# Altium PCB PCB_MB.PcbDoc
Units mm, origin at the board's own origin, x right, y up, seen from the top; angles counter-clockwise.
Board outline 168.5 x 167.5 mm, 4 copper layers (Top Layer, GROUND, Digital, Bottom Layer), stack 0.778 mm thick; 72 components, 91 nets, 516 pads, 10 vias.
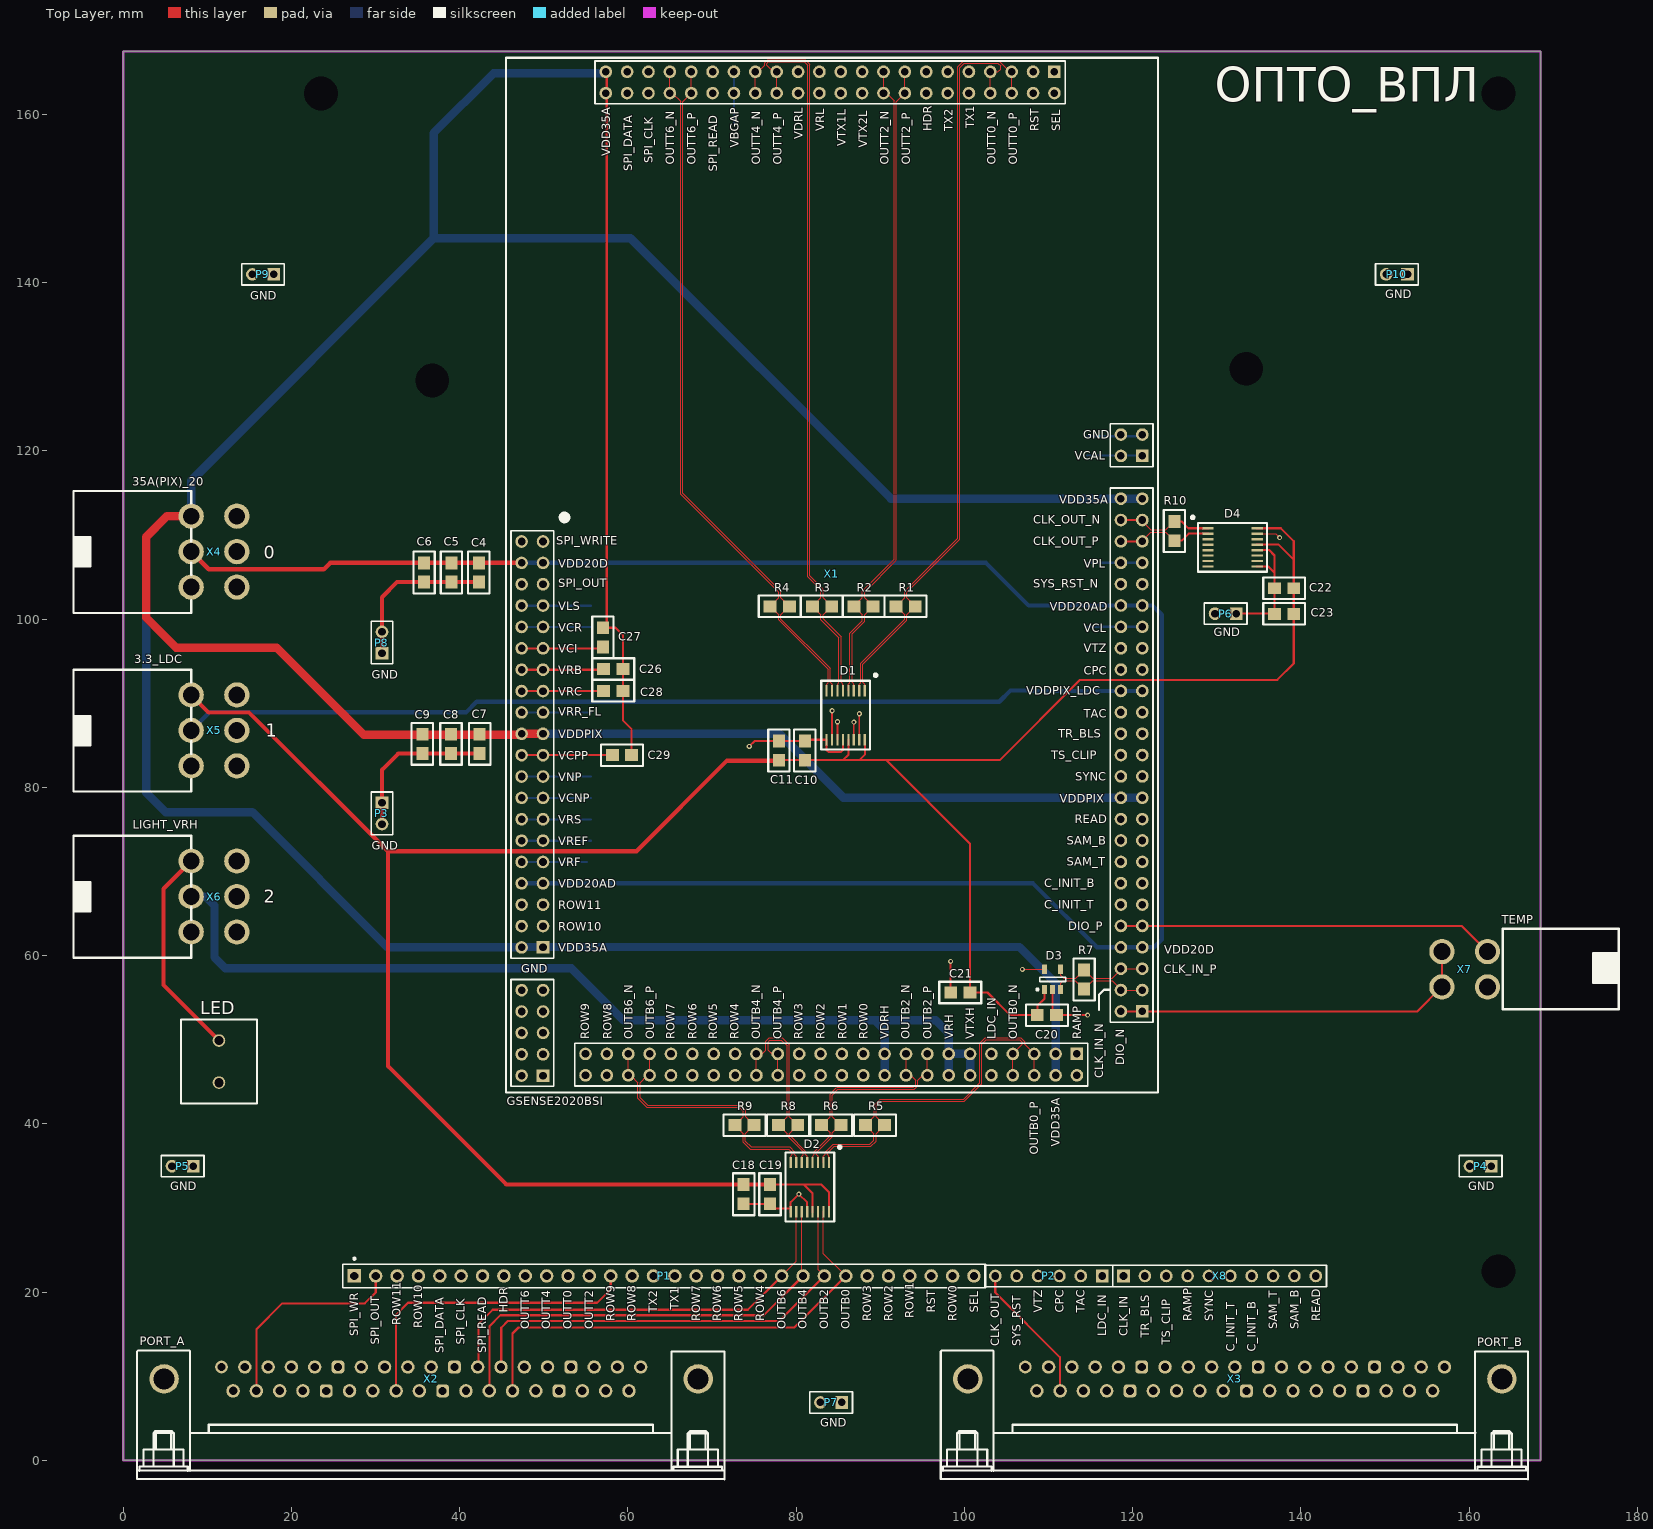
[diagram p0: Top Layer view]
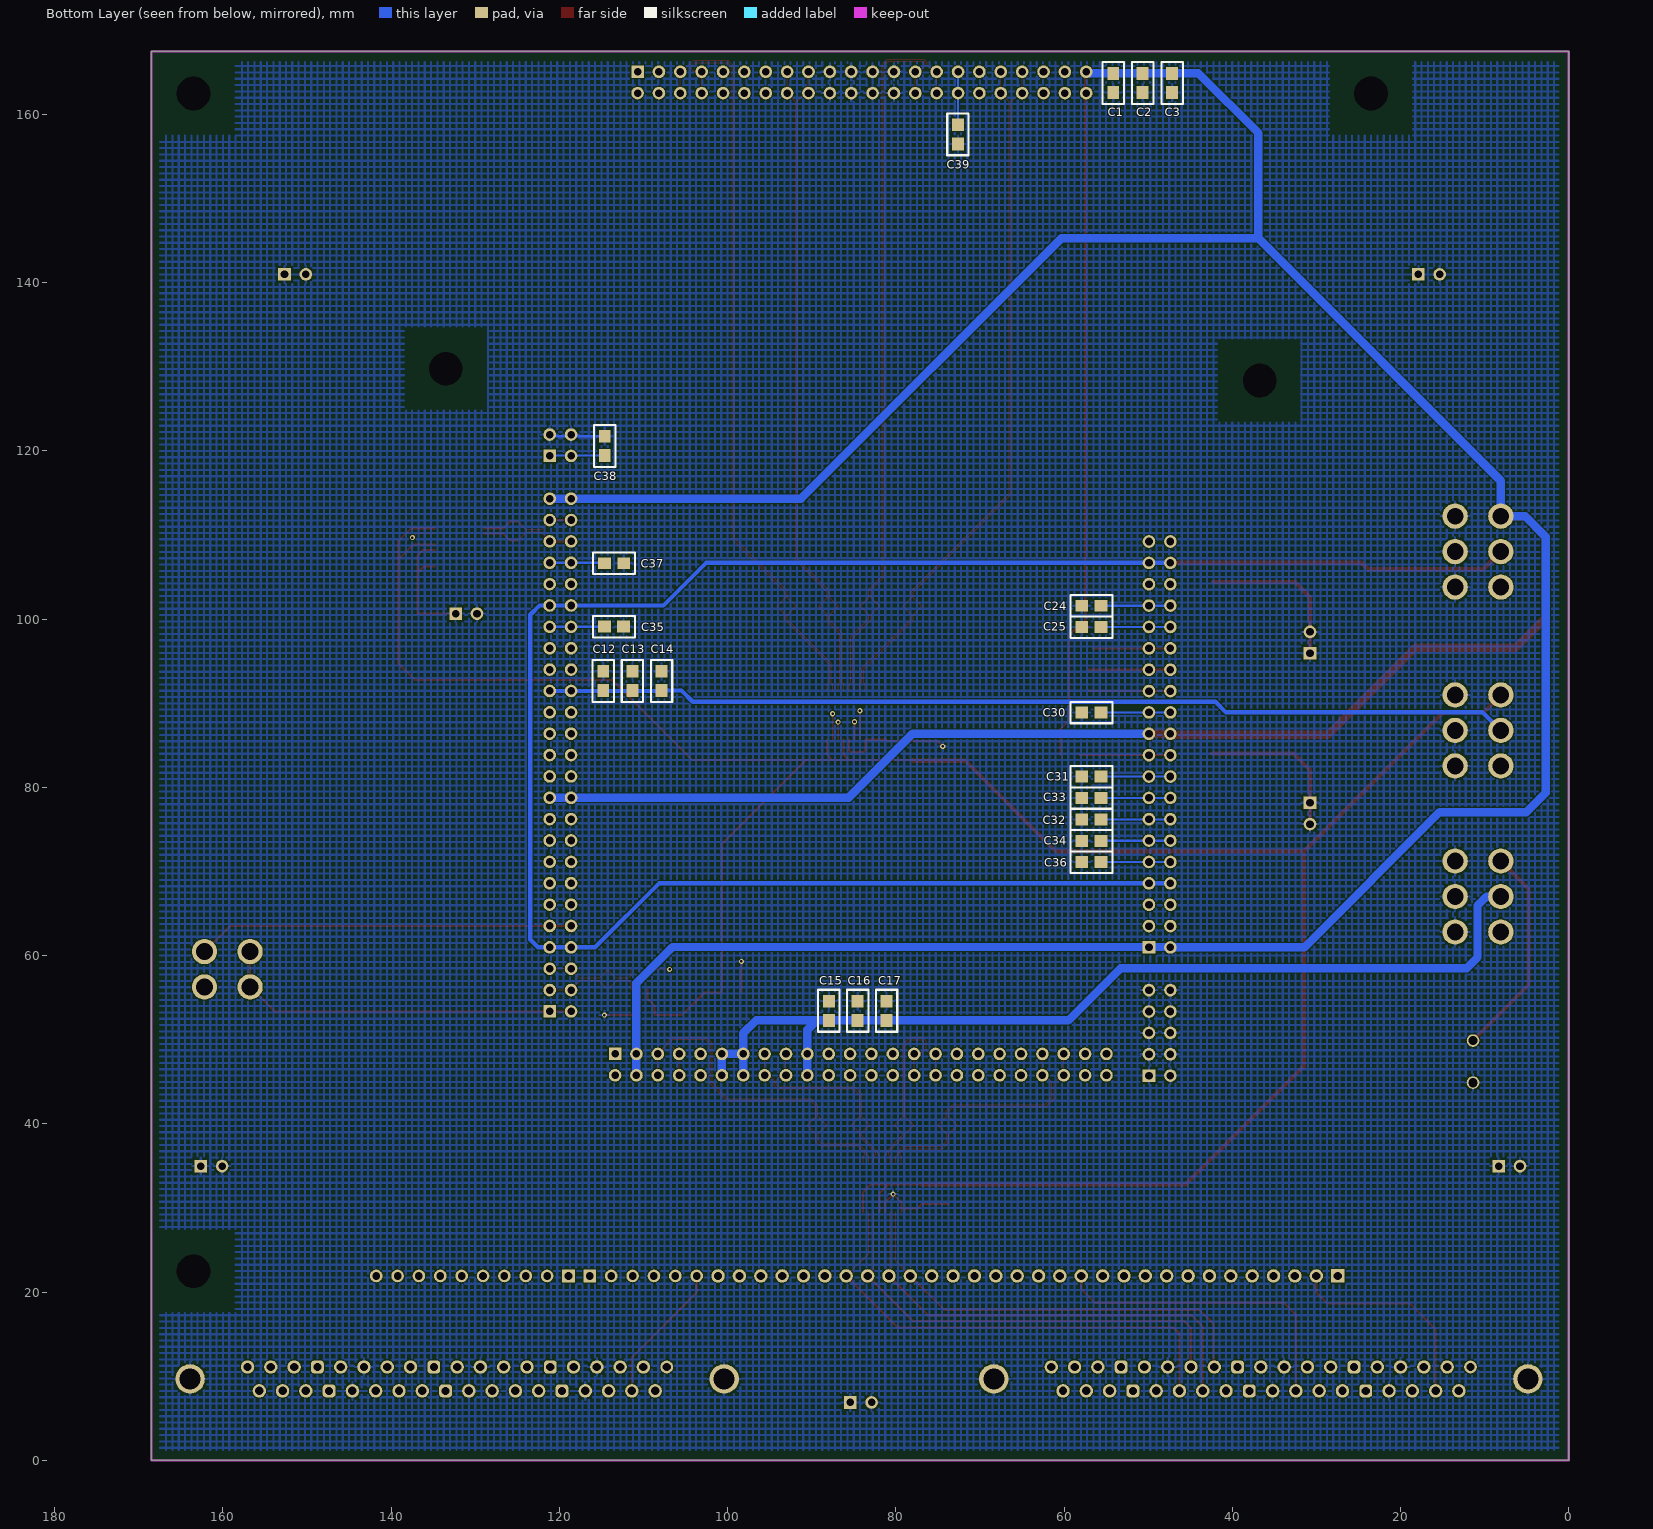
[diagram p1: Bottom Layer view, seen from below]
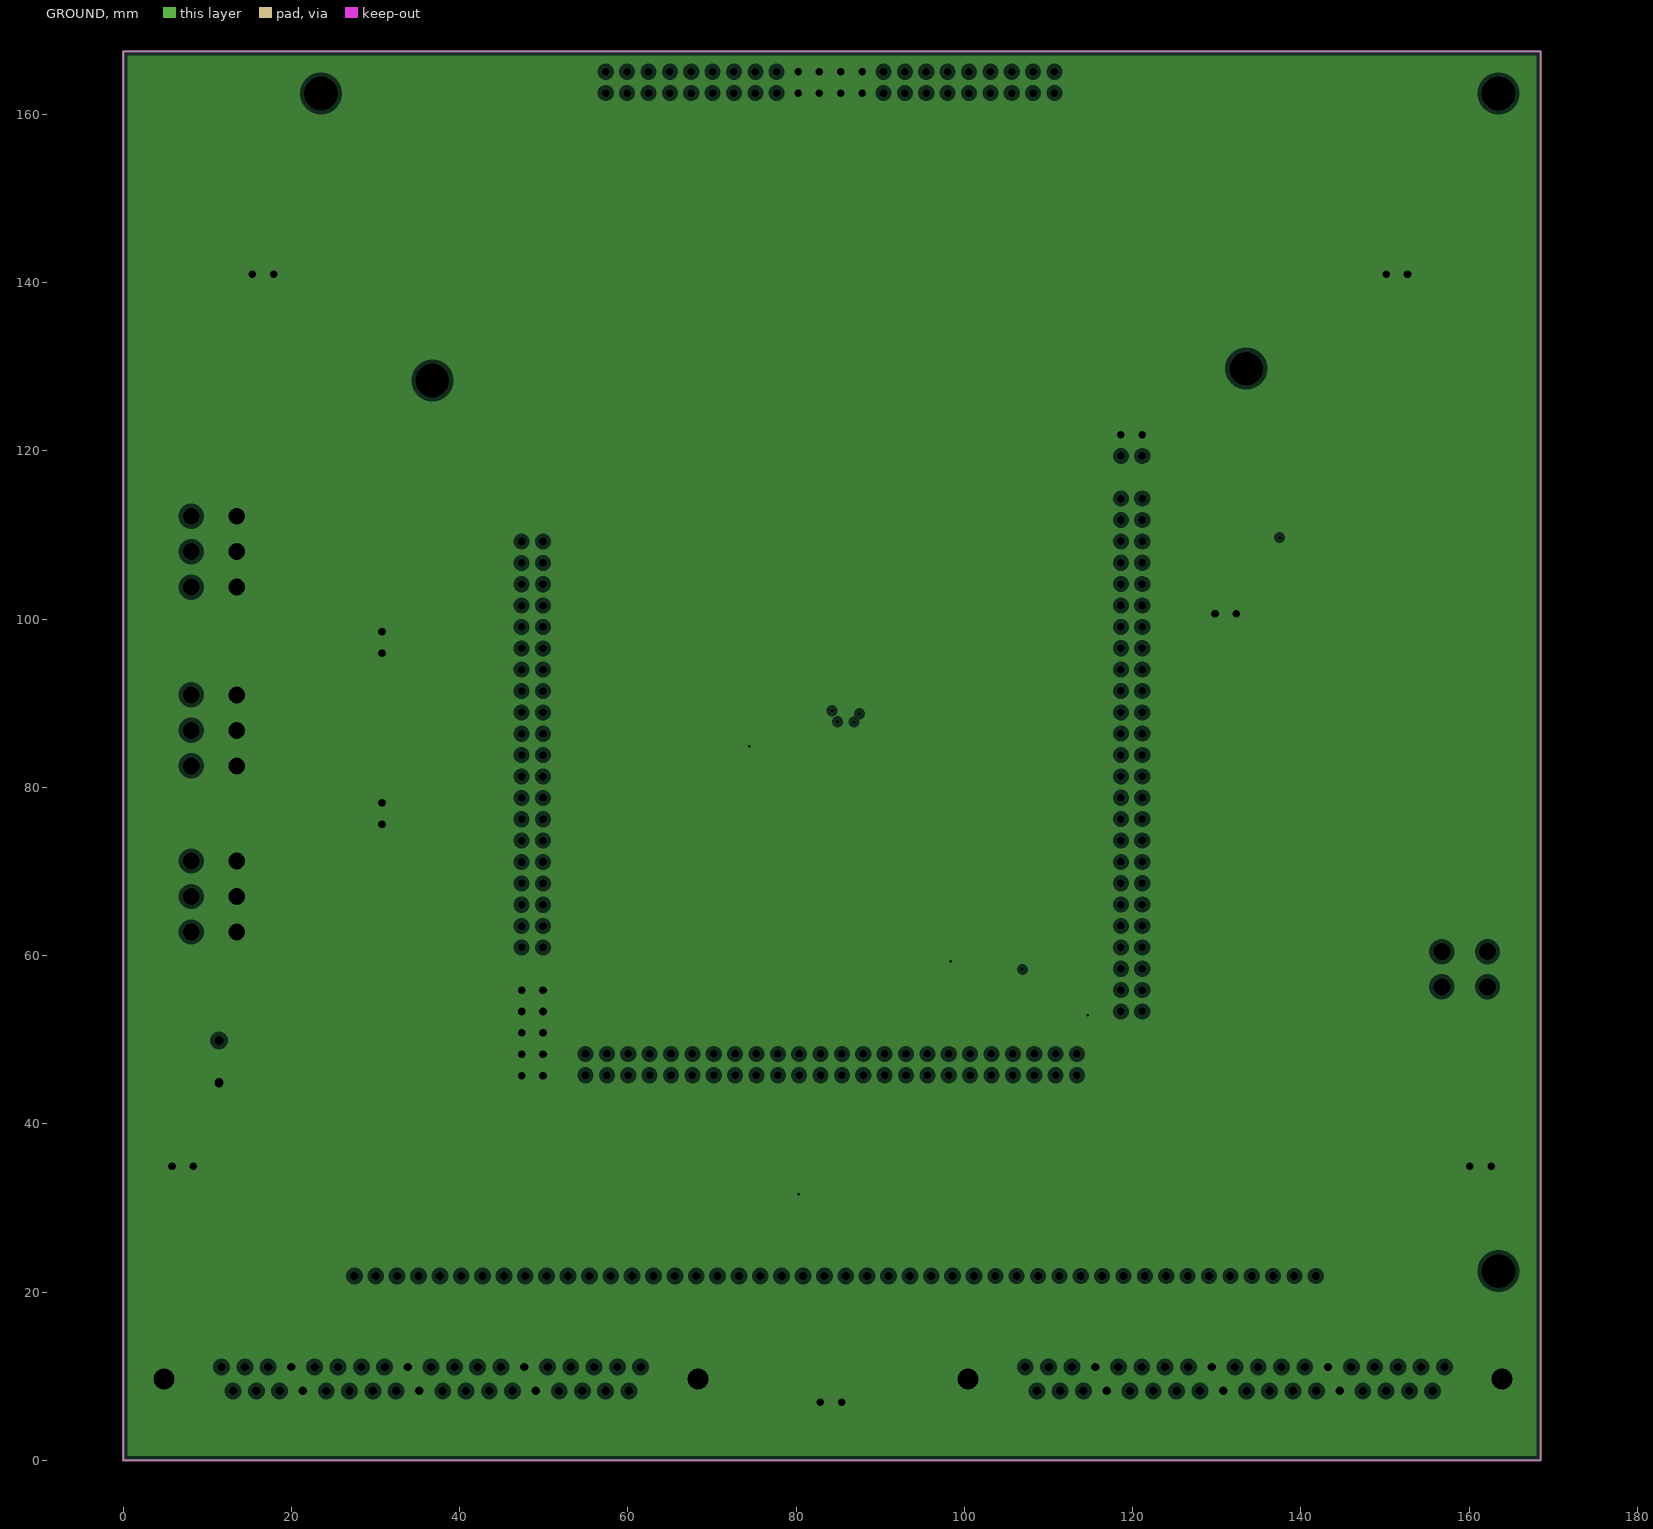
[diagram p2: GROUND, clearances drawn from the general rule]
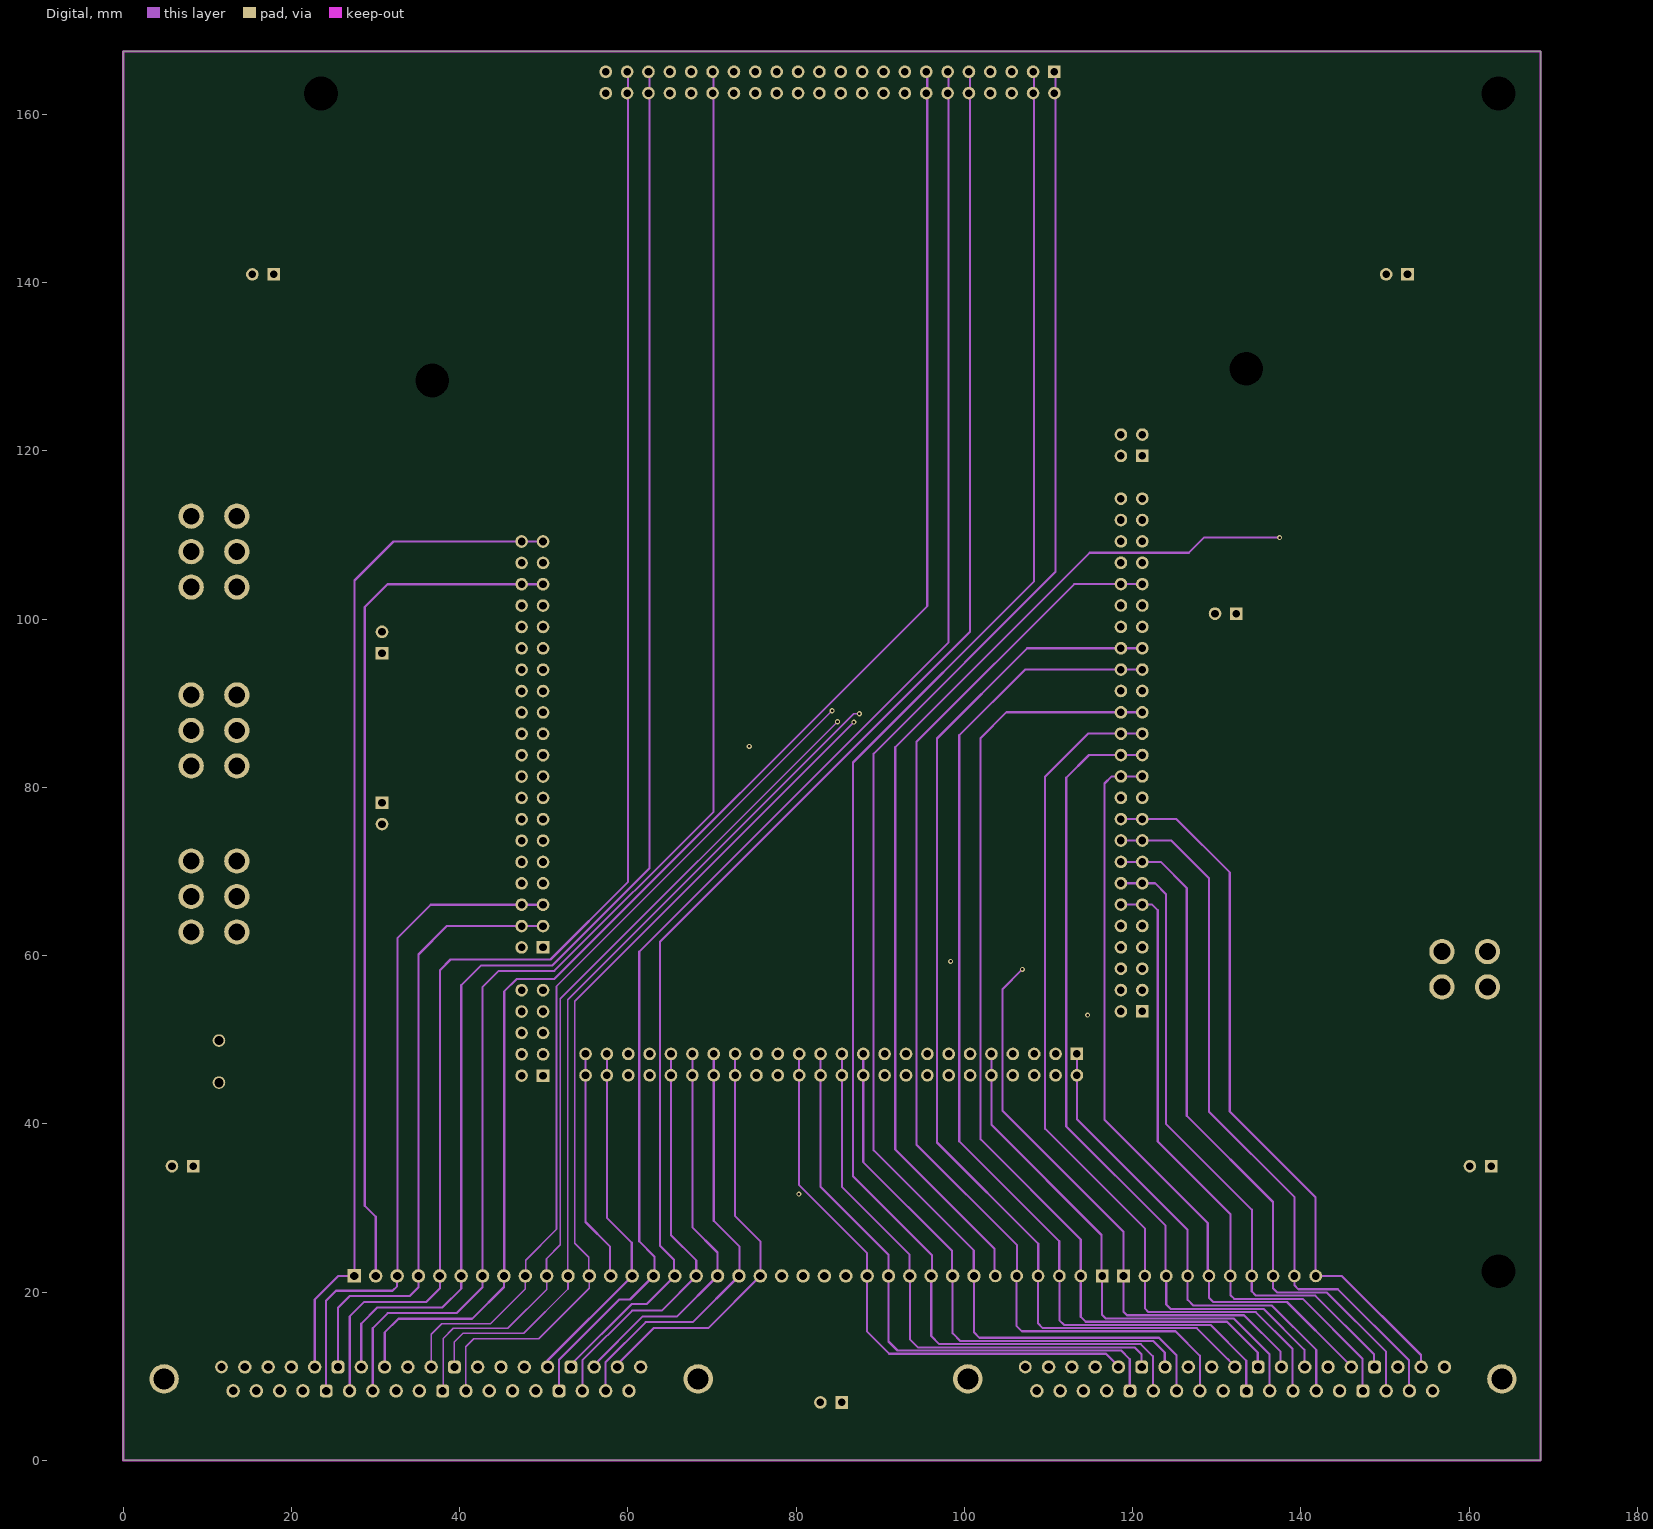
[diagram p3: Digital]

## Layer stack, top to bottom
Top Solder: solder mask 0.0102, Solder Resist, Dk 3.5
Top Layer: signal copper 0.0356
Dielectric 1: core 0.254, FR-4, Dk 4.2
GROUND: plane copper 0.036, net GND
Dielectric 2: core 0.254, Dk 4.2
Digital: signal copper 0.036
Dielectric 3: prepreg 0.127, Dk 4.2
Bottom Layer: signal copper 0.0356
Bottom Solder: solder mask 0.0102, Solder Resist, Dk 3.5

## Board outline
0,0 0,167.5 168.5,167.5 168.5,0

## Design rules (kind name [scope] priority, off if disabled: settings)
Clearance [All] p1: gap=0.127
DiffPairsRouting [All] p1: maxlimit=0.5 minlimit=0.127 mostfreqgap=0.254 toplayer_prefgap=0.127 toplayer_minwidth=0.127 toplayer_maxwidth=0.381 toplayer_prefwidth=0.127 midlayer1_mingap=0.254 midlayer1_maxgap=0.254 midlayer1_minwidth=0.127 midlayer1_maxwidth=0.381 midlayer1_prefwidth=0.381 bottomlayer_prefgap=0.127 bottomlayer_minwidth=0.127 bottomlayer_maxwidth=0.381 bottomlayer_prefwidth=0.127 maxuncoupledlength=12.7
PlaneClearance [All] p1: clearance=0.508
PlaneConnect [All] p1: planeconnectstyle=Relief reliefexpansion=0.508 reliefentries=4 reliefconductorwidth=0.254 reliefairgap=0.254
PolygonConnect [All] p1: connectstyle=Relief reliefconductorwidth=0.254 reliefentries=4 polygonreliefangle="90 Angle" airgapwidth=0.254
RoutingVias [All] p1: holewidth=0.711 width=1.27 viastyle="Through Hole" minholewidth=0.711 minwidth=1.27 maxholewidth=0.711 maxwidth=1.27
SolderMaskExpansion [All] p1: expansion=0.102
Width [All] p1: maxlimit=1 minlimit=0.125 preferedwidth=0.254
26 further rules are at their usual default settings.

## Classes and differential pairs
differential pair OUTT6: +OUTT6_P -OUTT6_N
differential pair OUTT4: +OUTT4_P -OUTT4_N
differential pair OUTT2: +OUTT2_P -OUTT2_N
differential pair OUTT0: +OUTT0_P -OUTT0_N
differential pair OUTB6: +OUTB6_P -OUTB6_N
differential pair OUTB4: +OUTB4_P -OUTB4_N
differential pair OUTB2: +OUTB2_P -OUTB2_N
differential pair OUTB0: +OUTB0_P -OUTB0_N
differential pair CLK_OUT: +CLK_OUT_P -CLK_OUT_N
differential pair CLK_IN: +CLK_IN_P -CLK_IN_N

## Components (designator, comment, footprint, x,y, rotation, side; value= is the part's Value field where it differs from the comment)
C1 "0,1 мк" CAP_SMALL 52.883,161.239 r90 bottom
C2 "0,1 мк" CAP_SMALL 49.378,161.239 r90 bottom
C3 "1 мк" CAP_SMALL 45.872,161.239 r90 bottom
C4 "0,1 мк" CAP_SMALL 43.536,103.048 r90 top
C5 "0,1 мк" CAP_SMALL 40.284,103.048 r90 top
C6 "1 мк" CAP_SMALL 37.033,103.048 r90 top
C7 "0,1 мк" CAP_SMALL 43.637,82.677 r90 top
C8 "0,1 мк" CAP_SMALL 40.234,82.677 r90 top
C9 "1 мк" CAP_SMALL 36.83,82.677 r90 top
C10 "0,1 мк" CAP_SMALL 76.683,86.893 r270 top
C11 "1 мк" CAP_SMALL 79.756,86.893 r270 top
C12 "0,1 мк" CAP_SMALL 116.053,95.174 r270 bottom
C13 "0,1 мк" CAP_SMALL 112.585,95.174 r270 bottom
C14 "1 мк" CAP_SMALL 109.118,95.174 r270 bottom
C15 "0,1 мк" CAP_SMALL 89.23,55.956 r270 bottom
C16 "0,1 мк" CAP_SMALL 85.801,55.956 r270 bottom
C17 "1 мк" CAP_SMALL 82.372,55.956 r270 bottom
C18 "0,1 мк" CAP_SMALL 75.032,29.134 r90 top
C19 "1 мк" CAP_SMALL 78.156,29.134 r90 top
C20 "0,1 мк" CAP_SMALL 112.319,54.204 r180 top
C21 "1 мк" CAP_SMALL 97.003,54.356 r0 top
C22 "0,1 мк" CAP_SMALL 135.509,102.413 r0 top
C23 "1 мк" CAP_SMALL 135.509,99.365 r0 top
C24 "0,1 мк" CAP_SMALL 59.258,100.33 r180 bottom
C25 "0,1 мк" CAP_SMALL 59.258,97.79 r180 bottom
C26 "1 мк" CAP_SMALL 60.757,95.352 r180 top
C27 "0,1 мк" CAP_SMALL 55.753,100.355 r270 top
C28 "1 мк" CAP_SMALL 60.757,92.761 r180 top
C29 "0,1 мк" CAP_SMALL 61.798,85.115 r180 top
C30 "1 мк" CAP_SMALL 59.258,87.63 r180 bottom
C31 "0,1 мк" CAP_SMALL 59.258,80.01 r180 bottom
C32 "1 мк" CAP_SMALL 59.258,74.93 r180 bottom
C33 "0,1 мк" CAP_SMALL 59.258,77.47 r180 bottom
C34 "1 мк" CAP_SMALL 59.258,72.39 r180 bottom
C35 "0,1 мк" CAP_SMALL 110.998,100.381 r0 bottom
C36 "1 мк" CAP_SMALL 59.258,69.85 r180 bottom
C37 "0,1 мк" CAP_SMALL 110.987,107.925 r0 bottom
C38 "0,1 мк" CAP_SMALL 115.875,123.114 r270 bottom
C39 "0,1 мк" CAP_SMALL 71.349,155.143 r90 bottom
D1 "SN65LVDS048A" "SN65LVDS048A (4LVDS)" 88.163,91.516 r180 top
D2 "SN65LVDS048A" "SN65LVDS048A (4LVDS)" 83.896,35.408 r180 top
D3 "DS90LV011A" DS90LV011A 110.49,57.175 r90 top
D4 "SN65LVDS048A" "SN65LVDS048A (4LVDS)" 128.956,110.82 r270 top
LED "LED" KLEMMNIK_2 11.379,44.907 r90 top
P1 "Header 30" HDR1X30 27.475,21.922 r0 top
P2 "Header 6" HDR1X6 116.375,21.922 r180 top
P3 "GND" HDR1X2 30.759,78.181 r270 top
P4 "GND" HDR1X2 162.636,34.976 r180 top
P5 "GND" HDR1X2 8.331,34.976 r180 top
P6 "GND" HDR1X2 132.334,100.66 r180 top
P7 "GND" HDR1X2 85.42,6.883 r180 top
P8 "GND" HDR1X2 30.759,95.961 r90 top
P9 "GND" HDR1X2 17.882,140.995 r180 top
P10 "GND" HDR1X2 152.679,141 r180 top
R1 "100" RES 90.526,102.768 r270 top
R2 "100" RES 85.522,102.768 r270 top
R3 "100" RES 80.594,102.768 r270 top
R4 "100" RES 75.565,102.768 r270 top
R5 "100" RES 86.893,41.097 r270 top
R6 "100" RES 81.686,41.097 r270 top
R7 "100" RES 112.979,54.686 r0 top
R8 "100" RES 76.556,41.097 r270 top
R9 "100" RES 71.374,41.097 r270 top
R10 "100" RES 123.723,108.001 r0 top
X1 "GSENSE2020BSI" GSENSE2020BSI_MEZ 47.362,45.74 r0 top
X2 "PORT_A" CHEAP_CONN_FEMALE 68.351,9.677 r180 top
X3 "PORT_B" CHEAP_CONN_FEMALE 163.906,9.677 r180 top
X4 "35A(PIX)_20" POWER 8.077,112.25 r90 top
X5 "3.3_LDC" POWER 8.077,91 r90 top
X6 "LIGHT_VRH" POWER 8.077,71.25 r90 top
X7 "TEMP" AMP_VOLTMETER 156.769,56.286 r90 top
X8 "Header 10" HDR1X10 118.915,21.922 r0 top

## Footprints (in the part's own frame and the unit in brackets; to place one, negate y for a bottom-side part, rotate by r counter-clockwise, add the part's x,y. Pads: shape width x height; smd on the part's side, far side on the other; paste and mask are expansions set on the pad)
AMP_VOLTMETER [mm] "AMP_VOLTMETER"
  round 3 hole 2: 1(0,0) 2(0,-5.423) 3(4.2,-5.423) 4(4.2,0)
  silkscreen extent -2.66,-21 6.94,-7.25
CAP_SMALL [mil] "FROM_MAX"
  rect 60x55.98 smd: 1(53.71,50) 2(143.71,50)
  silkscreen extent 1,0 197,100, body extent 20,18 178,82, height 100
CHEAP_CONN_FEMALE [mm] "CHEAP_CONN_FEMALE"
  round 1.6 hole 1: 1(6.833,-1.422) 2(9.601,-1.422) 3(12.37,-1.422) 5(17.907,-1.422) 6(20.676,-1.422) 7(23.444,-1.422) 8(26.213,-1.422) 10(31.75,-1.422) 11(34.519,-1.422) 12(37.287,-1.422) 13(40.056,-1.422) 15(45.593,-1.422) 16(48.362,-1.422) 17(51.13,-1.422) 18(53.899,-1.422) 20(8.23,1.422) 21(10.998,1.422) 22(13.767,1.422) 24(19.304,1.422) 25(22.073,1.422) 26(24.841,1.422) 27(27.61,1.422) 29(33.147,1.422) 30(35.916,1.422) 31(38.684,1.422) 32(41.453,1.422) 34(46.99,1.422) 35(49.759,1.422) 36(52.527,1.422) 37(55.296,1.422)
  rrect50% 1.524x1.524 hole 0.965: 4(15.138,-1.422) 9(28.981,-1.422) 14(42.824,-1.422) 23(16.535,1.422) 28(30.378,1.422) 33(44.221,1.422)
  round 1.524 hole 0.965: 19(56.667,-1.422)
  round 3.5 hole 2.5: 38(0,0) 39(63.5,0)
  silkscreen extent -3.11,-3.36 66.72,11.92
DS90LV011A [mm] "LVDS Driver 1 ch"
  rect 1.1x0.6 smd: 1(-1.2,0.95) 2(-1.2,0) 3(-1.2,-0.95) 4(1.2,-0.95) 5(1.2,0.95)
  silkscreen extent -1.32,-1.55 0.25,1.92, body extent -0.87,-1.52 0.87,1.53, height 1.45
GSENSE2020BSI_MEZ [mm]
  round 1.5 hole 0.9: 1(0,63.5) 1(2.54,63.5) 2(0,60.96) 2(2.54,60.96) 3(0,58.42) 3(2.54,58.42) 4(0,55.88) 4(2.54,55.88) 5(0,53.34) 5(2.54,53.34) 6(0,50.8) 6(2.54,50.8) 7(0,48.26) 7(2.54,48.26) 8(0,45.72) 8(2.54,45.72) 9(0,43.18) 9(2.54,43.18) 10(0,40.64) 10(2.54,40.64) 11(0,38.1) 11(2.54,38.1) 12(0,35.56) 12(2.54,35.56) 13(0,33.02) 13(2.54,33.02) 14(0,30.48) 14(2.54,30.48) 15(0,27.94) 15(2.54,27.94) 16(0,25.4) 16(2.54,25.4) 17(0,22.86) 17(2.54,22.86) 18(0,20.32) 18(2.54,20.32) 19(0,17.78) 19(2.54,17.78) 20(0,15.24) 21(0,10.16) 21(2.54,10.16) 22(0,7.62) 22(2.54,7.62) 23(0,5.08) 23(2.54,5.08) 24(0,2.54) 24(2.54,2.54) 25(0,0) 26(7.595,0.038) 26(7.595,2.578) 27(10.135,0.038) 27(10.135,2.578) 28(12.675,0.038) 28(12.675,2.578) 29(15.215,0.038) 29(15.215,2.578) 30(17.755,0.038) 30(17.755,2.578) 31(20.295,0.038) 31(20.295,2.578) 32(22.835,0.038) 32(22.835,2.578) 33(25.375,0.038) 33(25.375,2.578) 34(27.915,0.038) 34(27.915,2.578) 35(30.455,0.038) 35(30.455,2.578) 36(32.995,0.038) 36(32.995,2.578) 37(35.535,0.038) 37(35.535,2.578) 38(38.075,0.038) 38(38.075,2.578) 39(40.615,0.038) 39(40.615,2.578) 40(43.155,0.038) 40(43.155,2.578) 41(45.695,0.038) 41(45.695,2.578) 42(48.235,0.038) 42(48.235,2.578) 43(50.775,0.038) 43(50.775,2.578) 44(53.315,0.038) 44(53.315,2.578) 45(55.855,0.038) 45(55.855,2.578) 46(58.395,0.038) 46(58.395,2.578) 47(60.935,0.038) 47(60.935,2.578) 48(63.475,0.038) 48(63.475,2.578) 49(66.015,0.038) 50(71.247,7.633) 51(71.247,10.173) 51(73.787,10.173) 52(71.247,12.713) 52(73.787,12.713) 53(71.247,15.253) 53(73.787,15.253) 54(71.247,17.793) 54(73.787,17.793) 55(71.247,20.333) 55(73.787,20.333) 56(71.247,22.873) 56(73.787,22.873) 57(71.247,25.413) 57(73.787,25.413) 58(71.247,27.953) 58(73.787,27.953) 59(71.247,30.493) 59(73.787,30.493) 60(71.247,33.033) 60(73.787,33.033) 61(71.247,35.573) 61(73.787,35.573) 62(71.247,38.113) 62(73.787,38.113) 63(71.247,40.653) 63(73.787,40.653) 64(71.247,43.193) 64(73.787,43.193) 65(71.247,45.733) 65(73.787,45.733) 66(71.247,48.273) 66(73.787,48.273) 67(71.247,50.813) 67(73.787,50.813) 68(71.247,53.353) 68(73.787,53.353) 69(71.247,55.893) 69(73.787,55.893) 70(71.247,58.433) 70(73.787,58.433) 71(71.247,60.973) 71(73.787,60.973) 72(71.247,63.513) 72(73.787,63.513) 73(71.247,66.053) 73(73.787,66.053) 74(71.247,68.593) 74(73.787,68.593) 75(71.247,73.673) 76(71.247,76.213) 76(73.787,76.213) 77(63.34,116.806) 78(60.8,116.806) 78(60.8,119.346) 79(58.26,116.806) 79(58.26,119.346) 80(55.72,116.806) 80(55.72,119.346) 81(53.18,116.806) 81(53.18,119.346) 82(50.64,116.806) 82(50.64,119.346) 83(48.1,116.806) 83(48.1,119.346) 84(45.56,116.806) 84(45.56,119.346) 85(43.02,116.806) 85(43.02,119.346) 86(40.48,116.806) 86(40.48,119.346) 87(37.94,116.806) 87(37.94,119.346) 88(35.4,116.806) 88(35.4,119.346) 89(32.86,116.806) 89(32.86,119.346) 90(30.32,116.806) 90(30.32,119.346) 91(27.78,116.806) 91(27.78,119.346) 92(25.24,116.806) 92(25.24,119.346) 93(22.7,116.806) 93(22.7,119.346) 94(20.16,116.806) 94(20.16,119.346) 95(17.62,116.806) 95(17.62,119.346) 96(15.08,116.806) 96(15.08,119.346) 97(12.54,116.806) 97(12.54,119.346) 98(10,116.806) 98(10,119.346)
  rect 1.5x1.5 hole 0.9: 20(2.54,15.24) 25(2.54,0) 49(66.015,2.578) 50(73.787,7.633) 75(73.787,73.673) 77(63.34,119.346)
  silkscreen extent -1.86,-1.99 75.64,121.01
HDR1X2 [mm] "Connector; Header; 2 Position"
  rect 1.5x1.5 hole 0.9: 1(0,0)
  round 1.5 hole 0.9: 2(2.54,0)
  silkscreen extent -1.27,-1.27 3.81,1.27
HDR1X6 [mm] "Connector; Header; 6 Position"
  rect 1.5x1.5 hole 0.9: 1(0,0)
  round 1.5 hole 0.9: 2(2.54,0) 3(5.08,0) 4(7.62,0) 5(10.16,0) 6(12.7,0)
  silkscreen extent -1.27,-1.27 13.97,1.27
HDR1X10 [mm] "Connector; Header; 10 Position"
  rect 1.5x1.5 hole 0.9: 1(0,0)
  round 1.5 hole 0.9: 2(2.54,0) 3(5.08,0) 4(7.62,0) 5(10.16,0) 6(12.7,0) 7(15.24,0) 8(17.78,0) 9(20.32,0) 10(22.86,0)
  silkscreen extent -1.27,-1.27 24.13,1.27
HDR1X30 [mm] "Connector; Header; 30 Position"
  rect 1.6x1.6 hole 0.99: 1(0,0)
  round 1.6 hole 0.99: 2(2.54,0) 3(5.08,0) 4(7.62,0) 5(10.16,0) 6(12.7,0) 7(15.24,0) 8(17.78,0) 9(20.32,0) 10(22.86,0) 11(25.4,0) 12(27.94,0) 13(30.48,0) 14(33.02,0) 15(35.56,0) 16(38.1,0) 17(40.64,0) 18(43.18,0) 19(45.72,0) 20(48.26,0) 21(50.8,0) 22(53.34,0) 23(55.88,0) 24(58.42,0) 25(60.96,0) 26(63.5,0) 27(66.04,0) 28(68.58,0) 29(71.12,0) 30(73.66,0)
  silkscreen extent -1.4,-1.4 75.06,2.17
KLEMMNIK_2 [mm]
  round 1.5 hole 1.1: 1(0,0) 2(5,0)
  silkscreen extent -2.5,-4.5 7.5,4.5
POWER [mm] "POWER"
  round 3 hole 2: 1(0,0) 2(-4.217,0) 3(-8.435,0) 4(0,-5.422) 5(-4.217,-5.422) 6(-8.435,-5.422)
  silkscreen extent -11.5,0 3,14
RES [mil] "FROM_MAX"
  rect 55.98x60 smd: 1(49,52.71) 2(49,142.71)
  silkscreen extent -1,0 99,196, body extent 17,19 81,177, height 100
"SN65LVDS048A (4LVDS)" [mm]
  rect 0.28x1.35 smd: 1(0,0) 2(0.65,0) 3(1.3,0) 4(1.95,0) 5(2.6,0) 6(3.25,0) 7(3.9,0) 8(4.55,0) 9(4.55,5.85) 10(3.9,5.85) 11(3.25,5.85) 12(2.6,5.85) 13(1.95,5.85) 14(1.3,5.85) 15(0.65,5.85) 16(0,5.85)
  silkscreen extent -1.49,-2.03 5.18,7

## Part data
C1 C2 C3 C4 C5 C6 C7 C8 C9 C10 C11 C12 C13 C14 C15 C16 C17 C18 C19 C20 C21 C22 C23 C24 C25 C26 C27 C28 C29 C30 C31 C32 C33 C34 C35 C36 C37 C38 C39: library part CAP_SMALL
D1 D2 D4: library part "SN65LVDS048A (4LVDS)"
D3: "LVDS Driver 1 ch"
LED: library part KLEMMNIK_2
P1: "Header, 30-Pin"
P2: "Header, 6-Pin"
P3 P4 P5 P6 P7 P8 P9 P10: library part "Header 2", "Header, 2-Pin"
R1 R2 R3 R4 R5 R6 R7 R8 R9 R10: library part RES
X1: library part GSENSE2020BSI_MEZ
X2 X3: library part CHEAP_CON_37_FEMALE
X4 X5 X6: library part POWER
X7: library part AMP_VOLTMETER
X8: "Header, 10-Pin"

## Free pads (board coordinates)
  round 3 hole 4 unplated: 0(23.5,162.5) 0(36.749,128.374) 0(133.505,129.797) 0(163.5,22.5) 0(163.5,162.5)

## Via types
v1: diameter 0.6, hole 0.3, Top Layer to Bottom Layer, 10 vias

## Nets (pads, with @x,y where several pads share a name; then routed paths per layer and width w, separated by ;. In a path a pad name is that pad's centre, name@x,y a point inside that pad or via, vN(x,y) a via of type N, cw(c..) or ccw(c..) an arc to the next point about the centre after c; other vN are vias at no path point)
3.3V: C10.2 C11.2 C18.2 C19.2 C20.2 C21.2 C22.2 C23.2 D1.13 D1.16 D2.13 D2.16 D3.1 D4.13 D4.16 X5.1 | length 315.7
  Top Layer w0.254: C18.2 C19.2 ; C19.2@76.962,32.791 76.987,32.817 80.874,32.817 ; C10.2 C11.2 85.555,83.243 ; D2.13 81.946,31.744 80.874,32.817 ; D2.16 83.896,31.877 82.956,32.817 80.874,32.817 ; D1.13 86.213,83.902 85.555,83.243 ; D1.16 88.163,83.896 87.51,83.243 ; D3.1 109.54,54.905 108.669,54.033 C20.2 105.435,52.934 102.743,55.626 C21.2 100.653,73.337 90.747,83.243 ; D4.13 137.357,108.87 139.159,107.068 ; D4.16 137.617,110.82 139.159,109.278 139.159,107.068 ; 85.555,83.243 87.51,83.243 ; 87.51,83.243 90.747,83.243 ; 90.747,83.243 104.198,83.243 113.741,92.786 137.211,92.786 139.159,94.735 C23.2 C22.2 139.159,107.068
  Top Layer w0.5: X5.1 10.152,88.925 14.961,88.925 31.471,72.415 ; C19.2@76.962,32.791 45.542,32.791 31.471,46.863 31.471,72.415 ; C10.2 77.894,83.185 71.78,83.185 61.011,72.415 31.471,72.415
C_INIT_B: X1.56 X3.4 X8.7 | length 76.5
  Digital w0.254: X1.56@118.609,68.612 121.149,68.612 122.675,68.612 123.952,67.335 123.952,40.024 134.18,29.796 134.18,21.947 X8.7 134.155,20.099 134.671,19.583 141.707,19.583 148.692,12.598 148.692,11.176 X3.4
C_INIT_T: X1.55 X3.23 X8.6 | length 76.8
  Digital w0.254: X1.55@118.609,66.072 121.149,66.072 122.319,66.072 122.987,65.405 122.987,37.916 131.615,29.288 X8.6 ; X8.6@131.547,21.99 X8.6 ; X3.23 147.32,8.306 147.32,12.09 140.208,19.202 132.08,19.202 131.615,19.668 X8.6
CLK_IN: D3.5 X3.8 X8.1 | length 72.8
  Top Layer w0.127: v1(106.889,58.375) D3.5
  Digital w0.254: v1(106.889,58.375) 104.521,56.007 104.521,41.581 118.915,27.188 X8.1 118.915,17.661 119.329,17.247 133.248,17.247 137.592,12.903 137.592,11.201 X3.8
CLK_IN_N: D3.3 R7.1 X1.51 | length 12
  Top Layer w0.127: D3.3 111.44,56.728 111.76,57.048 113.2,57.048 R7.1 115.24,57.041 117.602,57.041 118.609,56.034 118.609,55.912 X1.51@121.149,55.912
CLK_IN_P: D3.4 R7.2 X1.52 | length 12
  Top Layer w0.127: D3.4 111.44,57.673 111.811,57.302 113.215,57.302 R7.2 115.24,57.295 117.602,57.295 118.609,58.302 118.609,58.452 X1.52@121.149,58.452
CLK_OUT: D4.15 P2.6 X3.36 | length 143.5
  Top Layer w0.127: D4.15 136.997,110.17 v1(137.465,109.703)
  Top Layer w0.254: P2.6 103.675,19.947 111.354,12.268 111.354,8.28 X3.36
  Digital w0.254: P2.6 103.599,21.998 103.599,25.122 91.77,36.951 91.77,84.785 114.884,107.899 126.67,107.899 128.473,109.703 v1(137.465,109.703)
CLK_OUT_N: D4.1 R10.2 X1.73 | length 11.7
  Top Layer w0.127: X1.73@121.149,111.792 121.149,111.635 122.174,110.61 123.952,110.61 R10.2
  Top Layer w0.254: X1.73@118.609,111.792 X1.73@121.149,111.792 ; R10.2 125.824,111.626 126.629,110.82 D4.1
CLK_OUT_P: D4.2 R10.1 X1.72 | length 11.6
  Top Layer w0.127: X1.72@121.149,109.252 121.149,109.331 122.174,110.356 123.952,110.356 R10.1
  Top Layer w0.254: X1.72@118.609,109.252 X1.72@121.149,109.252 ; R10.1 125.824,109.34 126.654,110.17 D4.2
CPC: P2.3 X1.66 X3.28 | length 127.3
  Digital w0.254: X1.66@121.149,94.012 118.609,94.012 107.195,94.012 99.39,86.208 99.39,37.941 111.269,26.062 111.269,21.947 P2.3 111.295,16.645 111.836,16.104 129.261,16.104 133.502,11.862 133.502,8.28 X3.28
DIO_N: X1.50 X7.1 X7.4 | length 43.6
  Top Layer w0.254: X1.50@118.609,53.372 121.149,53.372 153.855,53.372 X7.1 X7.4
DIO_P: X1.54 X7.3 | length 44.8
  Top Layer w0.254: X1.54@118.609,63.532 121.149,63.532 159.146,63.532 X7.3
GND: C1.1 C2.1 C3.1 C4.1 C5.1 C6.1 C7.1 C8.1 C9.1 C10.1 C11.1 C12.1 C13.1 C14.1 C15.1 C16.1 C17.1 C18.1 C19.1 C20.1 C21.1 C22.1 C23.1 C24.1 C25.1 C30.1 C31.1 C32.1 C33.1 C34.1 C35.1 C36.1 C37.1 C38.1 C39.1 D1.9 D1.12 D2.9 D2.12 D3.2 D4.9 D4.12 LED.1 P3.1 P3.2 P4.1 P4.2 P5.1 P5.2 P6.1 P6.2 P7.1 P7.2 P8.1 P8.2 P9.1 P9.2 P10.1 P10.2 X1.21 X1.22 X1.23 X1.24 X1.25 X1.76 X1.86 X1.87 X1.88 X1.89 X2.6 X2.11 X2.16 X2.24 X2.29 X2.34 X2.38 X2.39 X3.6 X3.11 X3.16 X3.24 X3.29 X3.34 X3.38 X3.39 X4.4 X4.5 X4.6 X5.4 X5.5 X5.6 X6.4 X6.5 X6.6 | length 96.5
  Top Layer w0.254: C18.1 C19.1 77.437,29.947 79.346,29.947 D2.9 79.346,30.68 v1(80.315,31.648) 81.296,30.667 D2.12 ; v1(74.422,84.887) 75.064,85.529 C10.1 C11.1 81.163,85.666 D1.9 83.613,84.458 83.871,84.201 85.293,84.201 85.563,84.471 D1.12 ; C21.1 v1(98.367,59.327) ; D3.2 110.49,53.398 C20.1 v1(114.656,52.934) ; P6.1 136.848,100.66 C23.1 C22.1 136.873,105.537 ; D4.9 136.14,106.27 136.873,105.537 ; D4.12 136.229,108.22 136.873,107.576 136.873,105.537
  Top Layer w0.508: P3.2 P3.1 30.759,82.093 32.708,84.041 C9.1 C8.1 C7.1 ; P8.1 P8.2 30.759,102.616 32.555,104.412 C6.1 C5.1 C4.1
  Bottom Layer w0.254: C38.1 120.946,121.75 X1.76@121.149,121.952
HDR: P1.8 X1.83 X2.12 | length 188.5
  Digital w0.254: X2.12 31.09,11.125 31.09,15.215 32.715,16.84 41.478,16.84 45.255,20.617 P1.8 45.288,21.955 45.288,55.753 46.761,57.226 51.257,57.226 95.584,101.553 95.584,119.26 95.584,164.964 X1.83@95.462,165.086
LDC_IN: P2.1 X1.45 X3.27 | length 62.7
  Digital w0.254: X1.45@103.217,48.318 103.217,45.778 103.217,39.881 116.299,26.799 116.299,21.998 P2.1 116.375,17.28 116.789,16.866 132.004,16.866 136.271,12.598 136.271,8.28 X3.27
LIGHT: LED.2 X6.1 | length 25.4
  Top Layer w0.508: X6.1 4.775,67.948 4.775,56.511 LED.2
OUTB0: D2.15 P1.24 X2.25 | length 58
  Top Layer w0.127: D2.15 83.246,24.57 P1.24
  Top Layer w0.254: X2.25 46.279,15.088 46.99,15.799 79.772,15.799 P1.24
OUTB0_N: D2.1 R5.2 X1.46 | length 40.5
  Top Layer w0.127: D2.1 83.896,36.171 83.698,36.369 83.698,36.525 84.511,37.338 88.875,37.338 89.502,37.966 89.502,38.837 R5.2 89.535,40.836 89.535,42.139 90.094,42.697 100.003,42.697 102.083,44.777 102.083,49.479 102.591,49.987 106.595,49.987 106.9,49.682 106.9,49.461 105.757,48.318 X1.46@105.757,45.778
OUTB0_P: D2.2 R5.1 X1.47 | length 41.3
  Top Layer w0.127: D2.2 83.246,36.171 83.444,36.369 83.444,36.63 84.406,37.592 88.769,37.592 89.248,38.071 89.248,38.837 R5.1 89.281,40.901 89.281,42.244 89.989,42.951 99.898,42.951 101.829,44.882 101.829,49.584 102.485,50.241 106.7,50.241 107.154,49.788 107.154,49.461 108.297,48.318 X1.47@108.297,45.778
OUTB2: D2.14 P1.23 X2.7 | length 53.6
  Top Layer w0.127: D2.14 82.596,22.68 P1.23
  Top Layer w0.254: X2.7 44.933,11.125 44.933,15.773 45.72,16.561 77.994,16.561 P1.23
OUTB2_N: D2.4 R6.1 X1.41 | length 25
  Top Layer w0.127: D2.4 81.946,36.171 82.144,36.369 82.144,36.678 84.049,38.583 84.049,38.938 83.337,39.649 83.228,39.649 R6.1 84.041,40.869 84.041,43.532 84.783,44.274 84.858,44.348 93.926,44.348 94.209,44.631 94.209,45.212 93.643,45.778 93.057,45.778 X1.41@93.057,48.318
OUTB2_P: D2.3 R6.2 X1.42 | length 25
  Top Layer w0.127: D2.3 82.596,36.171 82.398,36.369 82.398,36.573 84.303,38.477 84.303,38.938 85.217,39.853 R6.2 84.295,40.869 84.295,43.427 84.963,44.094 94.031,44.094 94.463,44.526 94.463,45.212 95.028,45.778 95.597,45.778 X1.42@95.597,48.318
OUTB4: D2.11 P1.22 X2.26 | length 55.2
  Top Layer w0.127: D2.11 80.646,22.09 P1.22
  Top Layer w0.254: X2.26 43.536,8.28 43.536,15.951 44.831,17.247 76.14,17.247 P1.22
OUTB4_N: D2.5 R8.2 X1.34 | length 23.9
  Top Layer w0.127: X1.34@75.277,45.778 75.277,48.318 75.978,48.318 76.403,48.743 76.403,49.838 76.781,50.216 78.337,50.216 79.164,49.389 79.164,40.869 R8.2 79.164,38.837 79.164,38.684 81.077,36.772 81.077,36.391 81.296,36.171 D2.5
OUTB4_P: D2.6 R8.1 X1.35 | length 23.1
  Top Layer w0.127: X1.35@77.817,45.778 77.817,48.318 77.082,48.318 76.657,48.743 76.657,49.733 76.886,49.962 78.232,49.962 78.91,49.283 78.91,40.869 R8.1 78.91,38.837 78.91,38.579 80.823,36.667 80.823,36.348 80.646,36.171 D2.6
OUTB6: D2.10 P1.21 X2.8 | length 51.9
  Top Layer w0.127: P1.21 78.275,21.928 79.996,23.649 D2.10
  Top Layer w0.254: X2.8 42.215,11.176 42.215,16.205 43.917,17.907 74.26,17.907 P1.21
OUTB6_N: D2.8 R9.1 X1.28 | length 31.2
  Top Layer w0.127: X1.28@60.037,48.318 60.037,45.778 60.318,45.778 61.189,44.907 61.189,43.024 62.252,41.961 73.246,41.961 73.729,41.478 73.729,40.869 R9.1 73.711,38.855 73.711,37.842 73.785,37.768 74.545,37.008 79.112,37.008 79.544,36.576 79.544,36.369 79.346,36.171 D2.8
OUTB6_P: D2.7 R9.2 X1.29 | length 31.2
  Top Layer w0.127: X1.29@62.577,48.318 62.577,45.778 62.313,45.778 61.443,44.907 61.443,43.129 62.357,42.215 73.351,42.215 73.983,41.583 73.983,40.869 R9.2 73.965,38.819 73.965,37.948 74.651,37.262 79.218,37.262 79.798,36.681 79.798,36.369 79.996,36.171 D2.7
OUTT0: D1.15 P1.11 X2.9 | length 105.4
  Top Layer w0.2: D1.15 v1(87.513,88.763)
  Digital w0.2: X2.9 39.345,11.125 39.345,14.072 40.386,15.113 47.625,15.113 52.875,20.363 P1.11 52.857,21.939 52.857,54.762 86.858,88.763 v1(87.513,88.763)
OUTT0_N: D1.1 R1.2 X1.80 | length 89.2
  Top Layer w0.127: D1.1 88.163,92.28 87.935,92.508 87.935,94.67 93.134,99.869 93.134,100.508 R1.2 93.134,102.54 93.134,103.226 99.441,109.532 99.441,165.557 100,166.116 103.988,166.116 104.292,165.811 104.292,165.405 103.973,165.086 103.082,165.086 X1.80@103.082,162.546
OUTT0_P: D1.2 R1.1 X1.79 | length 89.6
  Top Layer w0.127: D1.2 87.513,92.28 87.681,92.447 87.681,94.775 92.88,99.974 92.88,100.508 R1.1 92.88,102.54 92.88,103.331 99.187,109.637 99.187,165.662 99.289,165.764 99.895,166.37 104.093,166.37 105.377,165.086 105.622,165.086 X1.79@105.622,162.546
OUTT2: D1.14 P1.12 X2.27 | length 106.7
  Top Layer w0.2: D1.14 v1(86.863,87.757)
  Digital w0.2: X2.27 40.716,8.28 40.716,13.513 41.656,14.453 49.403,14.453 55.415,20.464 P1.12 55.347,21.99 55.347,24.13 53.67,25.806 53.67,54.564 v1(86.863,87.757)
OUTT2_N: D1.4 R2.1 X1.85 | length 77.4
  Top Layer w0.127: D1.4 86.213,92.28 86.385,92.452 86.385,98.356 87.877,99.847 87.877,100.508 R2.1 87.877,102.54 87.877,103.331 91.669,107.123 91.669,161.62 90.743,162.546 90.382,162.546 X1.85@90.382,165.086
OUTT2_P: D1.3 R2.2 X1.84 | length 77.1
  Top Layer w0.127: D1.3 86.863,92.28 86.639,92.504 86.639,98.251 88.131,99.742 88.131,100.508 R2.2 88.131,102.54 88.131,103.226 91.923,107.018 91.923,161.547 92.922,162.546 X1.84@92.922,165.086
OUTT4: D1.11 P1.10 X2.28 | length 104.9
  Top Layer w0.2: D1.11 v1(84.913,87.808)
  Digital w0.2: X2.28 38.024,8.306 38.024,14.478 39.243,15.697 45.72,15.697 50.335,20.312 P1.10 50.317,21.939 50.317,23.978 51.968,25.629 51.968,54.863 v1(84.913,87.808)
OUTT4_N: D1.5 R3.2 X1.91 | length 87
  Top Layer w0.127: X1.91@75.142,162.546 75.142,165.086 75.5,165.086 76.251,165.837 76.251,166.17 76.325,166.245 76.603,166.522 81.08,166.522 81.636,165.967 81.636,105.152 83.203,103.585 83.203,102.54 R3.2 83.203,100.508 83.203,100.051 85.344,97.91 85.344,92.499 85.563,92.28 D1.5
OUTT4_P: D1.6 R3.1 X1.90 | length 86.2
  Top Layer w0.127: X1.90@77.682,162.546 77.682,165.086 77.256,165.086 76.505,165.837 76.505,166.065 76.708,166.268 80.975,166.268 81.382,165.862 81.382,105.047 82.949,103.48 82.949,102.54 R3.1 82.949,100.508 82.949,99.945 85.09,97.804 85.09,92.456 84.913,92.28 D1.6
OUTT6: D1.10 P1.9 X2.10 | length 104.6
  Top Layer w0.2: D1.10 v1(84.263,89.117)
  Digital w0.2: X2.10 36.627,11.125 36.627,14.986 37.871,16.231 43.663,16.231 47.795,20.363 P1.9 47.854,21.981 47.854,23.8 51.511,27.457 51.511,56.365 v1(84.263,89.117)
OUTT6_N: D1.8 R4.1 X1.95 | length 82.5
  Top Layer w0.127: X1.95@64.982,165.086 64.982,162.546 65.292,162.546 66.269,161.569 66.269,114.851 77.92,103.2 77.92,102.54 R4.1 77.92,100.508 77.92,99.92 83.795,94.045 83.795,92.461 83.613,92.28 D1.8
OUTT6_P: D1.7 R4.2 X1.94 | length 82.2
  Top Layer w0.127: X1.94@67.522,165.086 67.522,162.546 66.523,161.547 66.523,114.957 78.174,103.305 78.174,102.54 R4.2 78.174,100.508 78.174,100.025 84.049,94.15 84.049,92.495 84.263,92.28 D1.7
RAMP: X1.49 X3.25 X8.4 | length 57.3
  Digital w0.254: X1.49@113.377,48.318 113.377,45.778 113.377,40.541 126.535,27.383 X8.4 126.535,19.083 127.229,18.39 136.576,18.39 141.834,13.132 X3.25
READ: X1.59 X3.2 X8.10 | length 85.6
  Digital w0.254: X1.59@118.609,76.232 121.149,76.232 125.215,76.232 131.547,69.901 131.547,41.48 141.724,31.302 141.724,21.973 X8.10 144.88,21.922 154.28,12.522 154.28,11.125 X3.2
ROW0: P1.29 X1.39 X3.13 | length 65.5
  Digital w0.254: X1.39@87.977,48.318 87.977,45.778 87.977,35.461 98.544,24.894 98.544,21.973 P1.29 98.595,15.096 99.492,14.199 122.453,14.199 123.825,12.827 123.825,11.125 X3.13
ROW1: P1.27 X1.38 X3.14 | length 67.1
  Digital w0.254: X1.38@85.437,48.318 85.437,45.778 85.437,32.515 93.489,24.462 93.489,21.947 P1.27 93.515,14.384 94.463,13.437 120.218,13.437 121.056,12.598 121.056,11.125 X3.14
ROW2: P1.26 X1.37 X3.33 | length 70.9
  Digital w0.254: X1.37@82.897,48.318 82.897,45.778 82.897,32.515 90.975,24.436 P1.26 90.975,14.13 92.05,13.056 118.643,13.056 119.659,12.04 119.659,8.28 X3.33
ROW3: P1.25 X1.36 X3.15 | length 68
  Digital w0.254: X1.36@80.357,48.318 80.357,45.778 80.357,32.718 88.409,24.665 88.409,21.947 P1.25 88.435,15.299 91.059,12.675 116.84,12.675 118.313,11.201 X3.15
ROW4: P1.20 X1.33 X2.2 | length 49.3
  Digital w0.254: X2.2 58.75,11.43 63.043,15.723 69.536,15.723 P1.20 75.743,21.93 75.743,26.035 72.737,29.041 72.737,45.778 X1.33@72.737,48.318
ROW5: P1.19 X1.32 X2.21 | length 51.2
  Digital w0.254: X2.21 57.328,8.28 57.328,11.659 62.103,16.434 67.707,16.434 P1.19 73.279,22.006 73.279,25.4 70.197,28.482 70.197,45.778 X1.32@70.197,48.318
ROW6: P1.18 X1.31 X2.3 | length 46.9
  Digital w0.254: X2.3 55.982,11.328 61.773,17.12 65.853,17.12 P1.18 70.637,21.939 70.637,24.714 67.657,27.695 67.657,45.778 X1.31@67.657,48.318
ROW7: P1.17 X1.30 X2.22 | length 49
  Digital w0.254: X2.22 54.585,11.887 60.503,17.805 63.998,17.805 P1.17 68.123,21.93 68.123,23.774 65.117,26.781 65.117,45.778 X1.30@65.117,48.318
ROW8: P1.14 X1.27 X2.5 | length 42.6
  Digital w0.254: X2.5 50.444,11.871 P1.14 60.452,21.965 60.452,25.883 57.497,28.838 57.497,45.778 X1.27@57.497,48.318
ROW9: P1.13 X1.26 X2.30 | length 65
  Top Layer w0.254: X2.30 32.436,17.323 33.858,18.745 56.337,18.745 57.955,20.363 P1.13
  Digital w0.254: X1.26@54.957,48.318 54.957,45.778 54.957,28.33 57.887,25.4 57.887,21.99 P1.13
ROW10: P1.4 X1.19 X2.14 | length 73.4
  Digital w0.254: X2.14 25.527,18.136 26.924,19.533 34.061,19.533 35.095,20.566 P1.4 35.103,21.93 35.103,60.147 38.475,63.52 47.362,63.52 X1.19@49.902,63.52
ROW11: P1.3 X1.18 X2.33 | length 80.2
  Digital w0.254: X2.33 24.105,8.28 24.105,18.974 25.298,20.168 32.004,20.168 32.555,20.718 P1.3 32.614,21.981 32.614,62.114 36.56,66.06 47.362,66.06 X1.18@49.902,66.06
RST: P1.28 X1.78 X3.32 | length 194.7
  Digital w0.254: X1.78@108.162,165.086 108.284,164.964 108.284,104.499 86.758,82.974 86.758,33.784 96.131,24.411 96.131,21.998 P1.28 96.055,14.791 97.028,13.818 120.98,13.818 122.403,12.395 122.403,8.306 X3.32
SAM_B: X1.58 X3.21 X8.9 | length 85.9
  Digital w0.254: X1.58@118.609,73.692 121.149,73.692 124.605,73.692 129.057,69.24 129.057,41.48 139.26,31.277 139.26,21.947 X8.9 139.235,20.811 139.7,20.345 144.399,20.345 152.857,11.887 152.857,8.306 X3.21
SAM_T: X1.57 X3.22 X8.8 | length 82.2
  Digital w0.254: X1.57@118.609,71.152 121.149,71.152 123.335,71.152 126.441,68.047 126.441,40.964 136.695,30.71 X8.8 136.695,20.48 137.211,19.964 143.078,19.964 150.139,12.903 X3.22
SEL: P1.30 X1.77 X3.31 | length 193.3
  Digital w0.254: X1.77@110.702,165.086 110.824,164.964 110.824,105.642 89.205,84.023 89.205,36.874 101.109,24.97 101.109,21.947 P1.30 101.135,15.223 101.778,14.58 123.139,14.58 125.197,12.522 125.197,8.28 X3.31
SPI_CLK: P1.6 X1.96 X2.13 | length 177.7
  Digital w0.254: X2.13 28.296,16.256 30.226,18.186 37.948,18.186 40.175,20.414 P1.6 40.183,21.93 40.183,56.49 42.545,58.852 51.029,58.852 62.564,70.387 62.564,164.964 X1.96@62.442,165.086
SPI_DATA: P1.5 X1.97 X2.32 | length 181.9
  Digital w0.254: X2.32 26.924,8.28 26.924,17.12 28.651,18.847 36.043,18.847 37.635,20.439 P1.5 37.668,21.955 37.668,58.293 38.913,59.538 50.789,59.538 60.024,68.772 60.024,164.964 X1.97@59.902,165.086
SPI_OUT: P1.2 X1.3 X2.36 | length 127.7
  Top Layer w0.254: X2.36 15.85,8.28 15.85,15.621 18.898,18.669 28.727,18.669 30.015,19.956 P1.2
  Digital w0.254: P1.2 30.023,21.93 30.023,28.956 28.702,30.277 28.702,101.448 31.414,104.16 47.362,104.16 X1.3@49.902,104.16
SPI_READ: P1.7 X1.93 X2.31 | length 182.4
  Digital w0.254: X2.31 29.667,15.723 31.445,17.501 39.624,17.501 42.715,20.591 P1.7 42.697,21.939 42.697,56.261 44.628,58.191 51.257,58.191 70.184,77.118 70.184,164.964 X1.93@70.062,165.086
SPI_WRITE: P1.1 X1.1 X2.15 | length 120.9
  Digital w0.254: X2.15 22.758,19.126 25.554,21.922 P1.1 27.483,21.93 27.483,104.597 32.125,109.24 47.362,109.24 X1.1@49.902,109.24
SYNC: X1.61 X3.5 X8.5 | length 91.5
  Digital w0.254: X1.61@121.149,81.312 118.609,81.312 117.507,81.312 116.662,80.467 116.662,40.481 128.922,28.221 128.922,22.074 X8.5 129.075,19.312 129.565,18.821 138.354,18.821 145.292,11.883 146.037,11.138 X3.5
SYS_RST_N: P2.5 X1.70 X3.30 | length 136.5
  Digital w0.254: X1.70@121.149,104.172 118.609,104.172 113.062,104.172 94.285,85.395 94.285,37.56 106.266,25.579 106.266,21.973 P2.5 106.215,15.959 106.832,15.342 125.095,15.342 127.991,12.446 X3.30
TAC: P2.2 X1.64 X3.9 | length 118.8
  Digital w0.254: X1.64@121.149,88.932 118.609,88.932 104.985,88.932 101.93,85.877 101.93,38.17 113.835,26.265 P2.2 113.835,17.077 114.427,16.485 131.216,16.485 134.874,12.827 134.874,11.151 X3.9
TR_BLS: X1.63 X3.26 X8.2 | length 106.4
  Digital w0.254: X1.63@121.149,86.392 118.609,86.392 114.688,86.392 109.601,81.305 109.601,39.414 121.48,27.535 121.48,21.947 X8.2 121.455,18.067 121.895,17.628 134.645,17.628 139.014,13.259 139.014,8.306 X3.26
TS_CLIP: X1.62 X3.7 X8.3 | length 98.4
  Digital w0.254: X1.62@121.149,83.852 118.609,83.852 114.815,83.852 112.116,81.153 112.116,39.694 123.919,27.891 123.919,21.998 X8.3 123.995,18.525 124.511,18.009 135.56,18.009 140.411,13.157 140.411,11.151 X3.7
TX1: P1.16 X1.81 X2.4 | length 176.2
  Digital w0.254: X2.4 53.213,11.354 60.452,18.593 62.246,18.593 P1.16 65.481,22.015 65.481,23.851 63.805,25.527 63.805,61.646 100.664,98.505 100.664,164.964 X1.81@100.542,165.086
TX2: P1.15 X1.82 X2.23 | length 178.3
  Digital w0.254: X2.23 51.791,8.28 51.791,11.938 58.979,19.126 60.239,19.126 P1.15 63.144,22.031 63.144,24.232 61.341,26.035 61.341,60.477 98.124,97.26 98.124,164.964 X1.82@98.002,165.086
VBGAP: C39.2 X1.92 | length 6.3
  Bottom Layer w0.254: X1.92@72.602,165.086 72.619,165.069 C39.2
VCAL: C38.2 X1.75 | length 6.6
  Bottom Layer w0.254: C38.2 121.098,119.464 X1.75@121.149,119.412
VCI: C27.2 X1.6 | length 9.2
  Top Layer w0.254: X1.6@47.362,96.54 49.902,96.54 56.527,96.54 C27.2@56.566,96.578
VCL: C35.2 X1.68 | length 6.5
  Bottom Layer w0.254: C35.2 121.131,99.111 X1.68@121.149,99.092
VCNP: C33.2 X1.13 | length 8.3
  Bottom Layer w0.254: X1.13@47.362,78.76 47.382,78.74 C33.2
VCPP: C29.2 X1.11 | length 10.8
  Top Layer w0.254: X1.11@47.362,83.84 49.902,83.84 58.142,83.84 C29.2
VCR: C25.2 X1.5 | length 8.2
  Bottom Layer w0.254: X1.5@47.362,99.08 47.382,99.06 C25.2@55.583,99.06
VDD20: C4.2 C5.2 C6.2 X1.2 X1.17 X1.53 X1.69 X4.2 | length 237.4
  Top Layer w0.508: X4.2 10.167,105.943 23.851,105.943 24.605,106.698 C6.2 C5.2 C4.2 47.36,106.698 X1.2@47.362,106.7
  Bottom Layer w0.508: X1.17@47.362,68.6 49.902,68.6 108.159,68.6 115.766,60.992 118.609,60.992 121.149,60.992 122.548,60.992 123.469,61.914 123.469,100.533 122.37,101.632 121.149,101.632 118.609,101.632 107.638,101.632 102.571,106.7 49.902,106.7 X1.2@47.362,106.7
"VDD35A (PIX)": C1.2 C2.2 C3.2 C7.2 C8.2 C9.2 C26.1 C27.1 C28.1 C29.1 X1.10 X1.20 X1.48 X1.60 X1.74 X1.98 X4.1 | length 583.2
  Top Layer w0.254: X1.98@57.362,165.086 57.484,164.964 57.484,99.452 C27.1 58.514,98.991 59.393,98.113 C28.1 59.393,87.978 60.434,86.937 C29.1
  Top Layer w1: X4.1 5.189,112.25 2.743,109.804 2.743,100.152 6.274,96.622 18.237,96.622 28.575,86.284 47.266,86.284 47.362,86.38 X1.10@49.902,86.38
  Bottom Layer w0.254: X1.20@47.362,60.98 49.902,60.98 60.122,60.98
  Bottom Layer w1: X1.10@49.902,86.38 78.009,86.38 85.616,78.772 118.609,78.772 X1.60@121.149,78.772 ; X1.98@57.362,165.086 57.165,164.889 C1.2 C2.2 C3.2 44.011,164.889 36.906,157.785 36.906,145.288 ; X1.48@110.837,45.778 110.837,48.318 110.837,56.753 106.553,61.036 47.418,61.036 47.362,60.98 31.425,60.98 15.342,77.064 5.029,77.064 2.743,79.35 2.743,109.804 5.189,112.25 X4.1 8.077,116.459 36.906,145.288 ; X1.74@121.149,114.332 118.609,114.332 91.255,114.332 60.3,145.288 36.906,145.288
VDDPIX_LDC: C12.2 C13.2 C14.2 X1.65 X5.2 | length 115.1
  Bottom Layer w0.508: X5.2 10.22,88.925 40.742,88.925 42.012,90.195 104.14,90.195 105.468,91.524 C14.2 107.9,91.472 118.609,91.472 X1.65@121.149,91.472
VLS: C24.2 X1.4 | length 8.3
  Bottom Layer w0.254: X1.4@47.362,101.62 47.382,101.6 C24.2
VNP: C31.2 X1.12 | length 8.3
  Bottom Layer w0.254: X1.12@47.362,81.3 47.382,81.28 C31.2
VPL: C37.2 X1.71 | length 6.4
  Bottom Layer w0.254: C37.2@114.724,106.655 114.782,106.712 118.609,106.712 X1.71@121.149,106.712
VRB: C26.2 X1.7 | length 9.8
  Top Layer w0.254: X1.7@47.362,94 49.902,94 57.025,94 C26.2
VRC: C28.2 X1.8 | length 9.8
  Top Layer w0.254: X1.8@47.362,91.46 49.902,91.46 57.076,91.46 C28.2
VREF: C34.2 X1.15 | length 8.3
  Bottom Layer w0.254: X1.15@47.362,73.68 47.382,73.66 C34.2
VRF: C36.2 X1.16 | length 7.8
  Bottom Layer w0.254: X1.16@47.362,71.14 47.382,71.12 C36.2@55.125,71.12
VRH: C15.2 C16.2 C17.2 X1.40 X1.43 X1.44 X6.2 | length 117.5
  Bottom Layer w1: X6.2 9.777,67.032 10.846,65.964 10.846,59.792 12.141,58.496 53.289,58.496 59.479,52.306 C17.2 C16.2 C15.2 89.401,52.306 ; X1.40@90.517,45.778 90.517,48.318 90.517,51.19 89.401,52.306 ; X1.43@98.137,45.778 X1.43@98.137,48.318 ; X1.44@100.677,45.778 100.677,48.318 X1.43@98.137,48.318 ; 89.401,52.306 96.614,52.306 98.137,50.784 X1.43@98.137,48.318
VRR_FL: C30.2 X1.9 | length 8.2
  Bottom Layer w0.254: X1.9@47.362,88.92 49.902,88.92 55.563,88.92 C30.2@55.583,88.9
VRS: C32.2 X1.14 | length 8.3
  Bottom Layer w0.254: X1.14@47.362,76.22 47.382,76.2 C32.2
VTZ: P2.4 X1.67 X3.10 | length 129.2
  Digital w0.254: X1.67@121.149,96.552 118.609,96.552 107.474,96.552 96.749,85.827 96.749,37.789 108.78,25.757 108.78,21.947 P2.4 108.755,16.289 109.322,15.723 127.635,15.723 131.318,12.04 ; 131.462,11.896 131.318,12.04 ; X3.10 132.156,11.201 131.318,12.04
pads on no net: D4.3 D4.4 D4.5 D4.6 D4.7 D4.8 D4.10 D4.11 D4.14 X2.1 X2.17 X2.18 X2.19 X2.20 X2.35 X2.37 X3.1 X3.3 X3.12 X3.17 X3.18 X3.19 X3.20 X3.35 X3.37 X4.3 X5.3 X6.3 X7.2

## Polygon pours and split planes (outlines as drawn)
GND on Bottom Layer "Top Layer-No Net" (hatched 90Degree grid 0.75 track 0.254, remove dead copper, pour order 4): 1.25,1.25 1.25,166.25 167.5,166.25 167.5,1.25
GND on GROUND (split plane): 167.99,0.51 0.51,0.51 0.51,166.99 167.99,166.99

## Keep-outs
Keep-Out Layer:
  the board outline again, w0.254

## Other copper
Bottom Layer:
  pour cut-out: 128.505,124.797 138.505,124.797 138.505,134.797 128.505,134.797
  pour cut-out: 31.804,123.374 41.804,123.374 41.804,133.374 31.804,133.374
  pour cut-out: 18.5,157.5 28.5,157.5 28.5,167.5 18.5,167.5
  pour cut-out: 158.5,17.5 168.5,17.5 168.5,27.5 158.5,27.5
  pour cut-out: 158.5,157.5 168.5,157.5 168.5,167.5 158.5,167.5

## Silkscreen, mask and mechanical layers (free items; w line width, h text height)
Top Overlay:
  text "ОПТО_ВПЛ" at 129.743,160.147 h7
  text "0" at 16.713,107.163 h1.52
  text "1" at 16.967,86.055 h1.52
  text "2" at 16.713,66.294 h1.52
  text "TX1" at 66.037,17.897 h1 r90
  text "HDR" at 45.705,17.564 h1 r90
  text "TX2" at 63.496,17.564 h1 r90
  text "RST" at 96.535,17.564 h1 r90
  text "SEL" at 101.619,17.564 h1 r90
  text "VTZ" at 109.243,17.564 h1 r90
  text "CPC" at 111.785,17.564 h1 r90
  text "TAC" at 114.326,17.564 h1 r90
  text "ROW1" at 93.994,16.897 h1 r90
  text "ROW9" at 58.413,16.564 h1 r90
  text "ROW8" at 60.954,16.564 h1 r90
  text "ROW7" at 68.579,16.564 h1 r90
  text "ROW6" at 71.12,16.564 h1 r90
  text "ROW5" at 73.662,16.564 h1 r90
  text "ROW4" at 76.203,16.564 h1 r90
  text "ROW3" at 88.911,16.564 h1 r90
  text "ROW2" at 91.452,16.564 h1 r90
  text "ROW0" at 99.077,16.564 h1 r90
  text "RAMP" at 127.034,16.564 h1 r90
  text "SYNC" at 129.575,16.564 h1 r90
  text "READ" at 142.283,16.564 h1 r90
  text "ROW11" at 32.998,16.064 h1 r90
  text "ROW10" at 35.539,15.731 h1 r90
  text "OUTT6" at 48.247,15.565 h1 r90
  text "OUTT4" at 50.788,15.565 h1 r90
  text "OUTT0" at 53.33,15.565 h1 r90
  text "OUTT2" at 55.871,15.565 h1 r90
  text "OUTB6" at 78.745,15.565 h1 r90
  text "OUTB4" at 81.286,15.565 h1 r90
  text "OUTB2" at 83.828,15.565 h1 r90
  text "OUTB0" at 86.369,15.565 h1 r90
  text "SAM_T" at 137.2,15.565 h1 r90
  text "SAM_B" at 139.741,15.565 h1 r90
  text "SPI_WR" at 27.915,14.731 h1 r90
  text "LDC_IN" at 116.868,14.731 h1 r90
  text "CLK_IN" at 119.409,14.731 h1 r90
  text "TR_BLS" at 121.951,14.565 h1 r90
  text "SPI_OUT" at 30.456,13.732 h1 r90
  text "SPI_CLK" at 40.622,13.732 h1 r90
  text "TS_CLIP" at 124.492,13.732 h1 r90
  text "CLK_OUT" at 104.16,13.565 h1 r90
  text "SYS_RST" at 106.702,13.565 h1 r90
  text "C_INIT_T" at 132.117,12.899 h1 r90
  text "C_INIT_B" at 134.658,12.899 h1 r90
  text "SPI_DATA" at 38.081,12.732 h1 r90
  text "SPI_READ" at 43.164,12.732 h1 r90

## Text inside footprints (layer, text, board x,y; h text height)
X1: Top Overlay "VDD35A" at 57.875,155.034 h1 r90; Top Overlay "SPI_DATA" at 60.5,153.25 h1 r90; Top Overlay "SPI_CLK" at 62.97,154.201 h1 r90; Top Overlay "OUTT6_N" at 65.518,154.034 h1 r90; Top Overlay "OUTT6_P" at 68.065,154.034 h1 r90; Top Overlay "SPI_READ" at 70.613,153.201 h1 r90; Top Overlay "VBGAP" at 73.161,156.033 h1 r90; Top Overlay "OUTT4_N" at 75.708,154.034 h1 r90; Top Overlay "OUTT4_P" at 78.256,154.034 h1 r90; Top Overlay "VDRL" at 80.804,157.033 h1 r90; Top Overlay "VRL" at 83.351,158.033 h1 r90; Top Overlay "VTX1L" at 85.899,156.2 h1 r90; Top Overlay "VTX2L" at 88.446,156.033 h1 r90; Top Overlay "OUTT2_N" at 90.994,154.034 h1 r90; Top Overlay "OUTT2_P" at 93.542,154.034 h1 r90; Top Overlay "HDR" at 96.089,158.033 h1 r90; Top Overlay "TX2" at 98.637,158.033 h1 r90; Top Overlay "TX1" at 101.185,158.366 h1 r90; Top Overlay "OUTT0_N" at 103.732,154.034 h1 r90; Top Overlay "OUTT0_P" at 106.28,154.034 h1 r90; Top Overlay "RST" at 108.827,158.033 h1 r90; Top Overlay "SEL" at 111.375,158.033 h1 r90; Top Overlay "CLK_IN_N" at 116.5,45.45 h1 r90; Top Overlay "DIO_N" at 119,46.95 h1 r90; Top Overlay "CLK_IN_P" at 123.723,57.912 h1; Top Overlay "VDD20D" at 123.75,60.25 h1; Top Overlay "DIO_P" at 112.332,63.036 h1; Top Overlay "VDD35A" at 111.25,113.75 h1; Top Overlay "CLK_OUT_N" at 108.166,111.35 h1; Top Overlay "CLK_OUT_P" at 108.166,108.807 h1; Top Overlay "VPL" at 114.165,106.098 h1; Top Overlay "SYS_RST_N" at 108.166,103.721 h1; Top Overlay "VDD20AD" at 110.166,101.012 h1; Top Overlay "VCL" at 114.165,98.469 h1; Top Overlay "VTZ" at 114.198,96.063 h1; Top Overlay "CPC" at 114.165,93.383 h1; Top Overlay "VDDPIX_LDC" at 107.333,91.007 h1; Top Overlay "TAC" at 114.165,88.298 h1; Top Overlay "TR_BLS" at 111.165,85.921 h1; Top Overlay "TS_CLIP" at 110.332,83.379 h1; Top Overlay "SYNC" at 113.157,80.772 h1; Top Overlay "VDDPIX" at 111.328,78.207 h1; Top Overlay "READ" at 113.1,75.75 h1; Top Overlay "SAM_B" at 112.165,73.207 h1; Top Overlay "SAM_T" at 112.165,70.664 h1; Top Overlay "C_INIT_B" at 109.499,68.121 h1; Top Overlay "C_INIT_T" at 109.499,65.579 h1; Top Overlay "RAMP" at 113.9,50.05 h1 r90; Top Overlay "VDD35A" at 111.328,37.287 h1 r90; Top Overlay "OUTB0_P" at 108.763,36.347 h1 r90; Top Overlay "OUTB0_N" at 106.3,50.05 h1 r90; Top Overlay "LDC_IN" at 103.7,50.05 h1 r90; Top Overlay "VTXH" at 101.2,50.05 h1 r90; Top Overlay "VRH" at 98.7,50.05 h1 r90; Top Overlay "OUTB2_P" at 96.1,50.05 h1 r90; Top Overlay "OUTB2_N" at 93.5,50.05 h1 r90; Top Overlay "VDRH" at 91,50.05 h1 r90; Top Overlay "ROW0" at 88.5,50.05 h1 r90; Top Overlay "ROW1" at 86.032,50.05 h1 r90; Top Overlay "ROW2" at 83.4,50.05 h1 r90; Top Overlay "ROW3" at 80.8,50.05 h1 r90; Top Overlay "OUTB4_P" at 78.3,50.05 h1 r90; Top Overlay "OUTB4_N" at 75.7,50.05 h1 r90; Top Overlay "ROW4" at 73.2,50.05 h1 r90; Top Overlay "ROW5" at 70.6,50.05 h1 r90; Top Overlay "ROW6" at 68.2,50.05 h1 r90; Top Overlay "ROW7" at 65.534,50.05 h1 r90; Top Overlay "OUTB6_P" at 63.1,50.05 h1 r90; Top Overlay "OUTB6_N" at 60.6,50.05 h1 r90; Top Overlay "ROW8" at 58.1,50.05 h1 r90; Top Overlay "ROW9" at 55.4,50.05 h1 r90; Top Overlay "VDD35A" at 51.7,60.45 h1; Top Overlay "ROW10" at 51.7,62.989 h1; Top Overlay "ROW11" at 51.7,65.527 h1; Top Overlay "VDD20AD" at 51.7,68.066 h1; Top Overlay "VRF" at 51.7,70.604 h1; Top Overlay "VREF" at 51.7,73.143 h1; Top Overlay "VRS" at 51.7,75.682 h1; Top Overlay "VCNP" at 51.7,78.22 h1; Top Overlay "VNP" at 51.7,80.759 h1; Top Overlay "VCPP" at 51.7,83.297 h1; Top Overlay "VDDPIX" at 51.7,85.836 h1; Top Overlay "VRR_FL" at 51.7,88.541 h1; Top Overlay "VRC" at 51.7,90.913 h1; Top Overlay "VRB" at 51.7,93.452 h1; Top Overlay "VCI" at 51.7,95.99 h1; Top Overlay "VCR" at 51.7,98.529 h1; Top Overlay "VLS" at 51.7,101.068 h1; Top Overlay "SPI_OUT" at 51.7,103.773 h1; Top Overlay "VDD20D" at 51.7,106.145 h1; Top Overlay "SPI_WRITE" at 51.5,108.85 h1; Top Overlay "GND" at 47.3,57.95 h1; Top Overlay "VCAL" at 113.148,118.93 h1; Top Overlay "GND" at 114.113,121.444 h1